# Altium PCB pcb_full_revB.PcbDoc
Units mm, origin at the board's own origin, x right, y up, seen from the top; angles counter-clockwise.
Board outline 25.68 x 19.18 mm, 2 copper layers (Top Layer, Bottom Layer); 35 components, 47 nets, 126 pads, 32 vias.
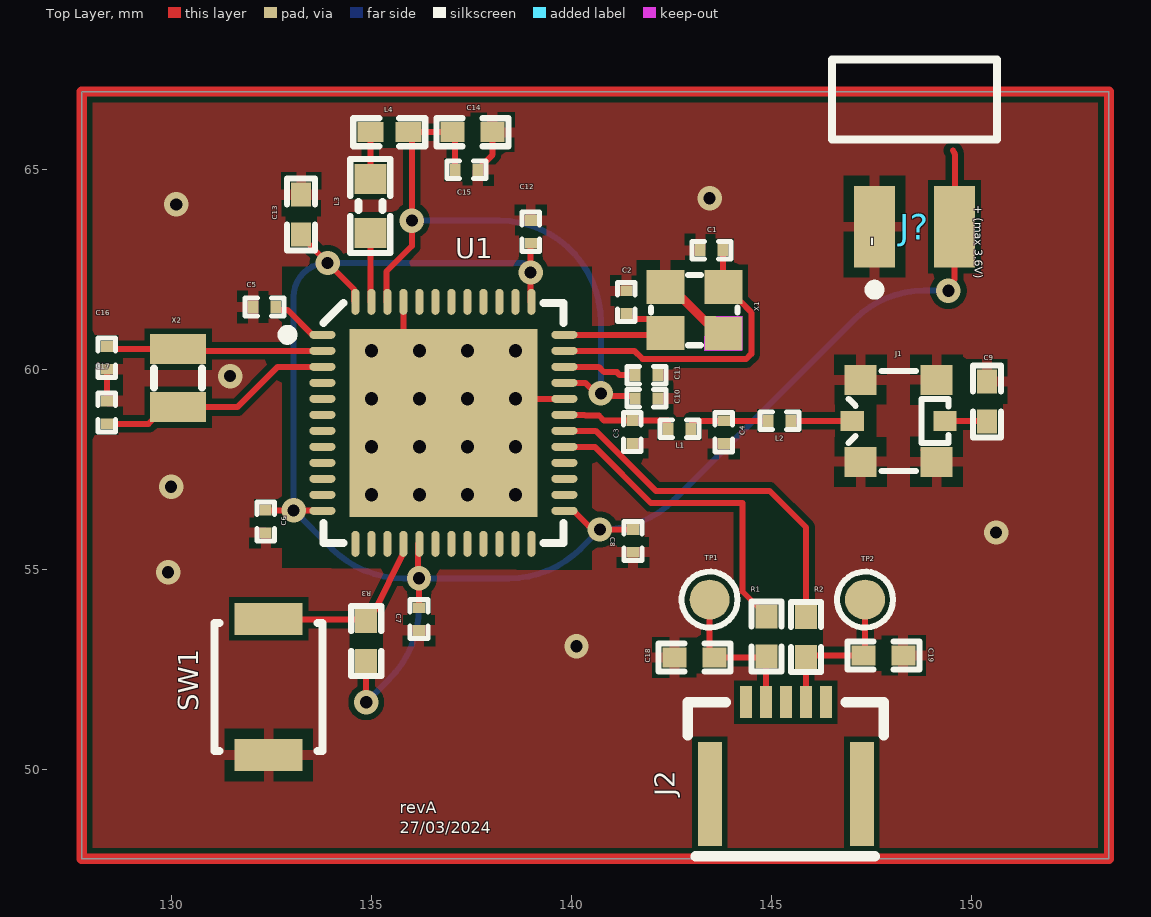
[diagram p0: Top Layer view]
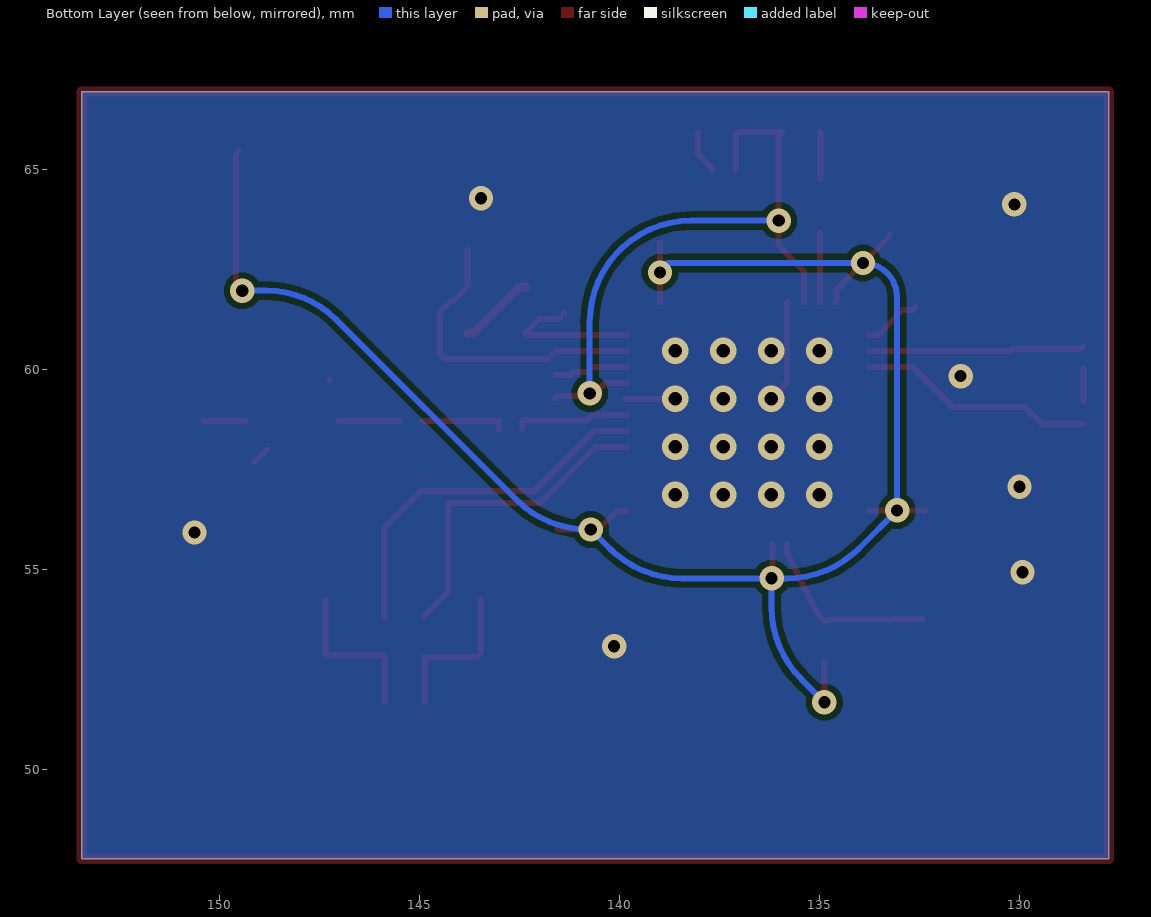
[diagram p1: Bottom Layer view, seen from below]
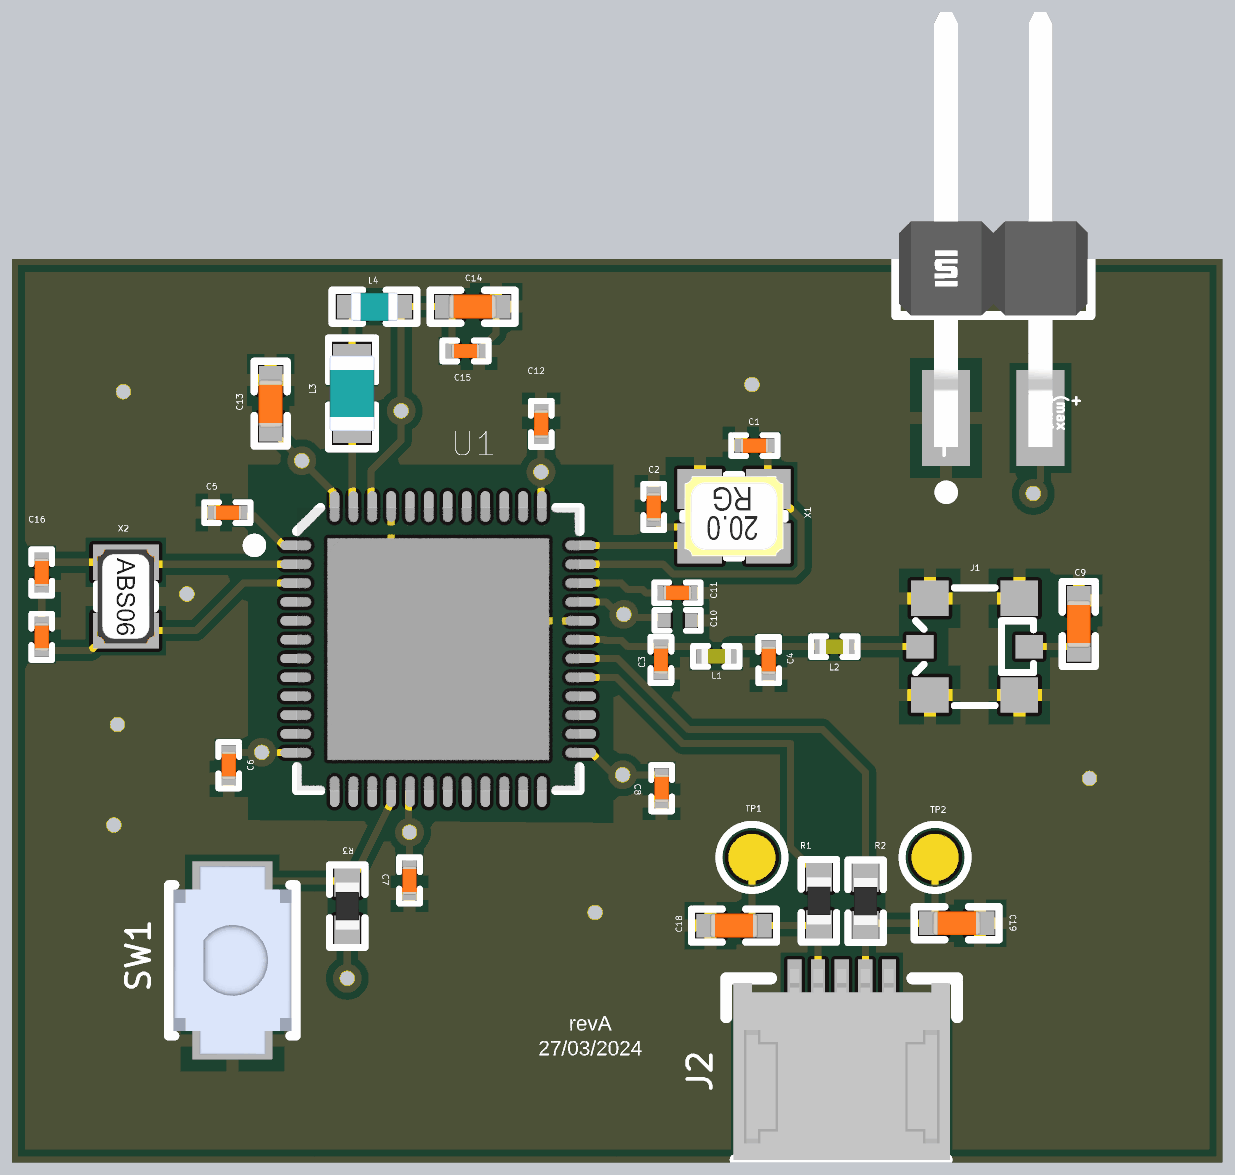
[diagram p2: 3D render of the assembled board from above, using the file's embedded part models]

## Layer stack, top to bottom
Top Solder: solder mask 0.0102, Solder Resist, Dk 3.5
Top Layer: signal copper 0.0356
Dielectric 1: dielectric 0.32, FR-4, Dk 4.8
Bottom Layer: signal copper 0.0356
Bottom Solder: solder mask 0.0102, Solder Resist, Dk 3.5

## Board outline
127.762,47.777 127.762,66.954 153.441,66.954 153.441,47.777

## Design rules (kind name [scope] priority, off if disabled: settings)
Clearance Polygon_ANT [(InNamedPolygon('Top_Layer-GND')) or (InNamedPolygon('Bottom_Layer-GND')) vs InNet('RF')] p1: gap=0.127 ignorepadtopadclearanceinfootprint=FALSE except(0: Arc-Hole Track-Hole SMDPad-Hole THPad-Hole Via-Hole Fill-Hole Poly-Hole Region-Hole Text-Hole)
Clearance Polygon [(InNamedPolygon('Top_Layer-GND')) or (InNamedPolygon('Bottom_Layer-GND'))] p2: gap=0.254 ignorepadtopadclearanceinfootprint=FALSE except(0: Arc-Hole Track-Hole SMDPad-Hole THPad-Hole Via-Hole Fill-Hole Poly-Hole Region-Hole Text-Hole)
Clearance [All] p3: gap=0.15 ignorepadtopadclearanceinfootprint=FALSE
ComponentClearance [All] p1 off: gap=0.254 collisioncheckmode=3 verticalgap=0.254 showdistances=FALSE
FabricationTestPointUsage TestPointUsage [All] p1: valid=0 allowmultiple=FALSE
FabricationTestpoint Testpoint [All] p1: side=3 testpointundercomponent=TRUE minsize=1.016 maxsize=2.54 preferedsize=1.524 minholesize=0 maxholesize=1.016 preferedholesize=0.813 testpointgrid=0.025 allowsidetop=TRUE allowsidebottom=TRUE usegrid=TRUE gridtolerance=0
Height [All] p1 off: minheight=0 maxheight=25.4 prefheight=12.7
HoleSize [All] p1: absolutevalues=TRUE maxlimit=4.064 minlimit=0.305 maxpercent=80.000 minpercent=20.000
MinimumAnnularRing [All] p1 off: minimumring=0.152
PolygonConnect PolygonConnect_1 [isVia and innet(gnd)] p1: connectstyle=Direct reliefconductorwidth=0.254 reliefentries=4 polygonreliefangle="90 Angle" airgapwidth=0.254
PolygonConnect [All] p2: connectstyle=Relief reliefconductorwidth=0.254 reliefentries=4 polygonreliefangle="90 Angle" airgapwidth=0.254
RoutingVias [All] p1: holewidth=0.406 width=0.813 viastyle="Through Hole" minholewidth=0.254 minwidth=0.254 maxholewidth=0.711 maxwidth=1.27
SilkToSolderMaskClearance SilkscreenOverComponentPads [IsPad] p1: minsilkscreentomaskgap=0.254 clearancetoexposedcopper=TRUE
SolderMaskExpansion SolderMaskExpansion_via [IsVia] p1: expansion=0.102 istentingtop=TRUE
SolderMaskExpansion [All] p2: expansion=0.076 istentingtop=FALSE
Width [All] p1: maxlimit=2.54 minlimit=0.15 preferedwidth=0.15
24 further rules are at their usual default settings.

## Components (designator, comment, footprint, x,y, rotation, side; value= is the part's Value field where it differs from the comment)
C1 "12pF" CAPC0603X03L_C#1 143.51,62.992 r180 top
C2 "12pF" CAPC0603X03L_C#1 141.376,61.691 r90 top
C3 "1.0pF" CAPC0603X03L_C#1 141.529,58.445 r90 top
C4 "1.2pF" CAPC0603X03L_C#1 143.815,58.44 r90 top
C5 "100nF" CAPC0603X03L_C#2 132.328,61.57 r180 top
C6 "100nF" CAPC0603X03L_C#2 132.359,56.21 r270 top
C7 "100nF" CAPC0603X03L_C#2 136.195,53.766 r270 top
C8 "100nF" CAPC0603X03L_C#2 141.543,55.722 r270 top
C9 "1.2pF" CAPC1005X04L 150.393,59.207 r90 top
C10 "N.C." CAPC0603X03L_C_NC 141.884,59.284 r180 top
C11 "100pF" CAPC0603X03L_C#1 141.879,59.868 r0 top
C12 "100nF" CAPC0603X03L_C#2 138.989,63.449 r90 top
C13 "1.0µF" CAPC1005X04L 133.248,63.881 r90 top
C14 "1.0µF" CAPC1005X04L 137.533,65.938 r180 top
C15 "47nF" CAPC0603X03L_C#1 137.383,64.999 r0 top
C16 "12pF" CAPC0603X03L_C#1 128.391,60.3 r270 top
C17 "12pF" CAPC0603X03L_C#1 128.391,58.934 r90 top
C18 "300pF" CAPC1005X04L 143.078,52.807 r180 top
C19 "300pF" CAPC1005X04L 147.803,52.857 r180 top
J1 "MM8130-2600" COAXIAL-SWF 148.184,58.725 r90 top
J2 "" FPC_05P-0.5mm-RA-SMD 144.364,51.689 r0 top value="FPC 0.5mm RA SMD"
J? "MMT-102-02-T-SH" FP-MMT-102-02-T-SH-MFG 148.581,66.751 r0 top
L1 "4.7nH" INDC0603X03L_C 142.703,58.522 r0 top
L2 "2.2nH" INDC0603X03L_C 145.206,58.725 r0 top
L3 "10µH" INDC1608X06L 134.976,64.099 r270 top
L4 "15nH" INDC1005X04L 135.451,65.938 r180 top
R1 "0R" RESC1005X04L 144.882,53.332 r90 top
R2 "0R" RESC1005X04L 145.872,53.323 r90 top
R3 "N.C." RESC1005X04L 134.874,53.221 r270 top
SW1 "B3U-1000P" FP-B3U-1000P-MFG 132.436,52.07 r90 top
TP1 "Ø1.0mm,SMD" TP_SMD_Ø1.0mm 143.459,54.254 r0 top
TP2 "Ø1.0mm,SMD" TP_SMD_Ø1.0mm 147.345,54.254 r0 top
U1 "nRF52840-QFAA" QFN40P600X600X90-48N 136.804,58.674 r0 top locked
X1 "32MHz" XTAL_2016_NT 143.078,61.493 r180 top
X2 "32.768kHz" XTAL_2012 130.175,59.792 r270 top

## Footprints (in the part's own frame and the unit in brackets; to place one, negate y for a bottom-side part, rotate by r counter-clockwise, add the part's x,y. Pads: shape width x height; smd on the part's side, far side on the other; paste and mask are expansions set on the pad)
CAPC0603X03L_C#1 [mm]
  rect 0.27x0.3 smd: 1(-0.285,0) 2(0.285,0)
  silkscreen extent -0.49,-0.22 0.49,0.22, body extent -0.3,-0.15 0.31,0.15, height 0.3
CAPC0603X03L_C#2 [mm]
  rect 0.27x0.3 smd mask+0.05: 1(-0.285,0) 2(0.285,0)
  silkscreen extent -0.49,-0.22 0.49,0.22, body extent -0.3,-0.15 0.31,0.15, height 0.3
CAPC0603X03L_C_NC [mm]
  rect 0.27x0.3 smd mask+0.05: 1(-0.285,0) 2(0.285,0)
  silkscreen extent -0.49,-0.22 0.49,0.22
CAPC1005X04L [mm]
  rect 0.6x0.5 smd: 1(-0.5,0) 2(0.5,0)
  silkscreen extent -0.9,-0.35 0.9,0.35, body extent -0.51,-0.25 0.51,0.25, height 0.5
COAXIAL-SWF [mm]
  rect 0.5x0.58 smd: 1(0,1.16) 3(0,-1.16)
  rect 0.75x0.8 smd: 2(-1.025,-0.95) 2(-1.025,0.95) 2(1.025,-0.95) 2(1.025,0.95)
  Top Layer pour cut-out: -0.65,0.55 0.65,0.55 0.65,1.35 -0.65,1.35
  Top Layer pour cut-out: 0.65,-0.55 -0.65,-0.55 -0.65,-1.35 0.65,-1.35
  silkscreen extent -1.25,-1.25 1.25,1.25, body extent -1.26,-1.3 1.26,1.3, height 1.55
FP-B3U-1000P-MFG [mm]
  rect 0.8x1.7 smd paste+0 mask+0: 1(-1.7,0) 2(1.7,0)
  silkscreen extent -1.6,-1.35 1.6,1.35, body extent -2.2,-1.45 2.2,1.45, height 0.25
FP-MMT-102-02-T-SH-MFG [mm]
  rect 1.02x2.03 smd paste+0 mask+0: 1(-1,-3.175) 2(1,-3.175)
  silkscreen extent -2.06,-4.87 2.06,1, body extent -2,-3.79 2,5.44, height 2
FPC_05P-0.5mm-RA-SMD [mm]
  rect 0.6x2.6 smd: 0(-0.9,-2.3) 0(2.9,-2.3)
  rect 0.3x0.8 smd: 1(0,0) 2(0.5,0) 3(1,0) 4(1.5,0) 5(2,0)
  silkscreen extent -1.45,-3.85 3.45,0, body extent -1.3,-3.85 3.3,0.2, height 1.2
INDC0603X03L_C [mm]
  rect 0.27x0.3 smd: 1(-0.285,0) 2(0.285,0)
  silkscreen extent -0.49,-0.22 0.49,0.22, body extent -0.31,-0.16 0.31,0.16, height 0.26
INDC1005X04L [mm]
  rect 0.65x0.5 smd: 1(-0.475,0) 2(0.475,0)
  silkscreen extent -0.9,-0.35 0.9,0.35, body extent -0.5,-0.3 0.5,0.3, height 0.5
INDC1608X06L [mm]
  rect 0.75x0.8 smd: 1(-0.675,0) 2(0.675,0)
  silkscreen extent -1.17,-0.5 1.17,0.5, body extent -0.8,-0.48 0.8,0.48, height 0.8
QFN40P600X600X90-48N [mm]
  oval 0.65x0.2 smd: 1(-3.025,2.2) 2(-3.025,1.8) 3(-3.025,1.4) 4(-3.025,1) 5(-3.025,0.6) 6(-3.025,0.2) 7(-3.025,-0.2) 8(-3.025,-0.6) 9(-3.025,-1) 10(-3.025,-1.4) 11(-3.025,-1.8) 12(-3.025,-2.2) 25(3.025,-2.2) 26(3.025,-1.8) 27(3.025,-1.4) 28(3.025,-1) 29(3.025,-0.6) 30(3.025,-0.2) 31(3.025,0.2) 32(3.025,0.6) 33(3.025,1) 34(3.025,1.4) 35(3.025,1.8) 36(3.025,2.2)
  oval 0.2x0.65 smd: 13(-2.2,-3.025) 14(-1.8,-3.025) 15(-1.4,-3.025) 16(-1,-3.025) 17(-0.6,-3.025) 18(-0.2,-3.025) 19(0.2,-3.025) 20(0.6,-3.025) 21(1,-3.025) 22(1.4,-3.025) 23(1.8,-3.025) 24(2.2,-3.025) 37(2.2,3.025) 38(1.8,3.025) 39(1.4,3.025) 40(1,3.025) 41(0.6,3.025) 42(0.2,3.025) 43(-0.2,3.025) 44(-0.6,3.025) 45(-1,3.025) 46(-1.4,3.025) 47(-1.8,3.025) 48(-2.2,3.025)
  rect 4.7x4.7 smd: 49(0,0)
  silkscreen extent -4.02,-3 3,3, body extent -3.02,-3.02 3.02,3.02, height 0.86
RESC1005X04L [mm]
  rect 0.6x0.55 smd: 1(-0.5,0) 2(0.5,0)
  silkscreen extent -0.87,-0.38 0.88,0.38, body extent -0.5,-0.25 0.5,0.25, height 0.3
TP_SMD_Ø1.0mm [mm]
  round 1 smd paste-5: 1(0,0)
  silkscreen extent -0.7,-0.7 0.7,0.7
XTAL_2012 [mm]
  rect 0.75x1.4 smd: 1(-0.725,0) 2(0.725,0)
  silkscreen extent -0.24,-0.6 0.24,0.6, body extent -1,-0.61 1,0.61, height 0.6
XTAL_2016_NT [mm]
  rect 0.95x0.85 smd: 1(-0.725,-0.575) 2(-0.725,0.575) 2(0.725,-0.575) 3(0.725,0.575)
  Top Layer lines w0.225: 0.725,-0.575 0.575,-0.575 -0.575,0.575 -0.725,0.575
  Top Layer keep-out lines w0.01: -0.25,0.65 -0.25,1 -1.2,1 -1.2,0.15 -0.55,0.15
  silkscreen extent -1.08,-0.88 1.08,0.88, body extent -1.05,-0.85 1.05,0.85, height 0.56

## Part data
C1 C2 C16 C17: library part C0201-12p, "Capacitor, NP0, ±2%", Component Class=Capacitors, Footprint Doc=0201, LatestRevisionDate=2017-11-09, Pad Count=2, Part Number=C0201-12p, Published=2014-11-13
C3: library part C0201-1.0p, "Capacitor, NP0, ±10%", Component Class=Capacitors, Footprint Doc=0201, LatestRevisionDate=2018-10-22, Pad Count=2, Part Number=C0201-1.0p, Published=2014-11-13
C4: library part C0201-1.2p, "Capacitor, NP0, ±10%", Component Class=Capacitors, Footprint Doc=0201, LatestRevisionDate=2020-10-13, Pad Count=2, Part Number=C0201-1.2p, Published=2014-11-13
C5 C6 C7 C8 C12: library part C0201-100n, "Capacitor, X5R, ±10%", Component Class=Capacitors, Footprint Doc=0201, LatestRevisionDate=2017-11-09, Pad Count=2, Part Number=C0201-100n, Published=2014-11-13
C9: library part C0402-1.2p, "Capacitor, NP0, ±0.1pF", Manufacturer=N.A., Part number IPS=00000005410, Artikkelnr Noca=20029157, Author=rsk, Component Class=Capacitors, ComponentLink1Description=Datasheet, ComponentLink1URL=N.A., ComponentLink2Description="Supplier link", ComponentLink2URL=N.A., Footprint Doc=0402, HelpURL=N.A., LatestRevisionDate=2011-05-11, Manufacturer Part Number=N.A., Note=50V, Pad Count=2, Part Number=C0402-1.2p, Part number Norautron=N.A., PartId=100200119, Pin Count=2, Published=2009-05-08, Publisher="Nordic Semiconductor", Supplier 1=N.A., Supplier 2=N.A., Supplier Part Number 1=N.A., Supplier Part Number 2=N.A.
C10: library part C0201-N.C., "Not mounted", Assembly="Not mounted", Component Class=Capacitors, Footprint Doc=0201, LatestRevisionDate=2014-11-13, Pad Count=2, Part Number=C0201-N.C., Published=2014-11-13
C11: library part C0201-100p, "Capacitor, NP0, ±5%", Component Class=Capacitors, Footprint Doc=0201, LatestRevisionDate=2019-04-16, Pad Count=2, Part Number=C0201-100p, Published=2019-04-16
C13 C14: library part C0402-1µ0, "Capacitor, X5R, ±10%", Component Class=Capacitors, Footprint Doc=0402, LatestRevisionDate=2016-08-22, Pad Count=2, Part Number=C0402-1µ0, Published=2009-05-08
C15: library part C0201-47n, "Capacitor, X5R, ±10%", Component Class=Capacitors, Footprint Doc=0201, LatestRevisionDate=2017-11-09, Pad Count=2, Part Number=C0201-47n, Published=2014-11-13
C18 C19: library part C0402-300p, "Capacitor, NP0, ±5%", Manufacturer=N.A., Part number IPS=00000007788, Supplier Part Number 1=490-3234-1-ND, Artikkelnr Noca=20020004, Author=rsk, Component Class=Capacitors, ComponentLink1Description=Datasheet, ComponentLink1URL=N.A., ComponentLink2Description="Supplier link", ComponentLink2URL=N.A., Footprint Doc=0402, HelpURL=N.A., LatestRevisionDate=2020-10-13, Manufacturer Part Number=N.A., Note=50V, Pad Count=2, Part Number=C0402-300p, Part number Norautron=N.A., PartId=100200155, Pin Count=2, Published=2015-05-29, Publisher="Nordic Semiconductor", Supplier 1=Digi-Key, Supplier 2=N.A., Supplier Part Number 2=N.A.
J1: "Coaxial Connector with Switch", Manufacturer=Murata, Part number IPS=00000009955, Part number Norautron=N.A., Supplier Part Number 1=490-4981-1-ND, Artikkelnr Noca=55029011, Author=rsk, Component Class=Connectors, ComponentLink1Description=Datasheet, ComponentLink1URL=N.A., ComponentLink2Description="Supplier link", ComponentLink2URL=N.A., Footprint Doc=COAXIAL-SWF, HelpURL=http://www.murata.com/products/catalog/pdf/o33e.pdf, LatestRevisionDate=2014-04-24, Manufacturer Part Number=MM8130-2600, Note=N.A., Pad Count=3, Part Number=MM8130-2600, PartId=100500400, Pin Count=3, Published=2014-04-24, Publisher="Nordic Semiconductor", Supplier 1=Digi-Key, Supplier 2=Mouser, Supplier Part Number 2=81-MM8130-2600RA2
J2: library part FPC_05P-0.5mm-RA-SMD, "0.5mm FPC, 5P,Right Angle SMT,Double Contact,H=1.2mm,White, Tin plated", Manufacturer=W-CON, Manufacturer Part Number=5141-05RZDNWR01, Part number IPS=00000007792, Part number Norautron=N.A., Artikkelnr Noca=55010020, Author=rsk, Component Class=Connectors, ComponentLink1Description=Datasheet, ComponentLink1URL=N.A., ComponentLink2Description="Supplier link", ComponentLink2URL=N.A., Footprint Doc=FPC_05P-0.5mm-RA-SMD, HelpURL=\\hizz\pro\app9717\Datasheet\connectors\W-CON\5141-XXRZDNXX0X.pdf, LatestRevisionDate=2016-04-21, Note=N.A., Pad Count=7, Part Number=FPC_05P-0.5mm-RA-SMD, PartId=100500528, Pin Count=7, Published=2015-06-22, Publisher="Nordic Semiconductor", Supplier 1=Cabcon, Supplier 2=Digi-Key, Supplier Part Number 1=5141-05RZDNWR01, Supplier Part Number 2=WM9836CT-ND
J?: library part CMP-02766-001413-1, "CONN HEADER SMD R/A 2POS 2MM", Contact Plating=Tin, Gender=Male, Number of Contacts=2, Number of Rows=1, Packaging=Bulk, Pitch=2mm, Radiation Hardening=No, RoHS Compliant=Yes, Termination=Solder
L1: library part L0201-4n7, "High frequency chip inductor ±5%", Component Class=Inductors, Footprint Doc=0201, LatestRevisionDate=2013-04-10, Pad Count=2, Part Number=L0201-4n7, Published=2013-04-10
L2: library part L0201-2n2, "High frequency chip inductor ±5%", Component Class=Inductors, Footprint Doc=0201, LatestRevisionDate=2013-04-10, Pad Count=2, Part Number=L0201-2n2, Published=2013-04-10
L3: library part L0603-10µ-TDK, "Chip inductor, IDC,min = 50 mA, ±20%", Component Class=Inductors, Footprint Doc=0603, LatestRevisionDate=2012-09-19, Pad Count=2, Part Number=L0603-10µ-TDK, Published=2019-05-06
L4: library part L0402-15n, "High frequency chip inductor ±10%", Component Class=Inductors, Footprint Doc=0402, LatestRevisionDate=2012-09-19, Pad Count=2, Part Number=L0402-15n, Published=2010-07-12
R1 R2: library part R0402-0R, "Resistor, ±5%, 0.063W", Manufacturer=N.A., Part number IPS=00000007128, Supplier Part Number 1=146-9661, Artikkelnr Noca=27049000, Author=rsk, Component Class=Resistors, ComponentLink1Description=Datasheet, ComponentLink1URL=N.A., ComponentLink2Description="Supplier link", ComponentLink2URL=N.A., Footprint Doc=0402, HelpURL=N.A., LatestRevisionDate=2009-11-23, Manufacturer Part Number=N.A., Note="Chip Res 5%", Pad Count=2, Part Number=R0402-0R, Part number Norautron=N.A., PartId=100100109, Pin Count=2, Published=2009-05-08, Publisher="Nordic Semiconductor", Supplier 1=Farnell, Supplier 2=N.A., Supplier Part Number 2=N.A.
R3: library part R0402-N.C., "Not mounted", Manufacturer=N.A., Artikkelnr Noca=N.A., Assembly="Not mounted", Author=rsk, Component Class=Resistors, ComponentLink1Description=Datasheet, ComponentLink1URL=N.A., ComponentLink2Description="Supplier link", ComponentLink2URL=N.A., Footprint Doc=0402, HelpURL=N.A., LatestRevisionDate=2009-05-08, Manufacturer Part Number=N.A., Note="Chip Res", Pad Count=2, Part Number=R0402-N.C., Part number IPS=N.A., Part number Norautron=N.A., PartId=100100281, Pin Count=2, Published=2009-05-08, Publisher="Nordic Semiconductor", Supplier 1=N.A., Supplier 2=N.A., Supplier Part Number 1=N.A., Supplier Part Number 2=N.A.
SW1: library part CMP-2100-03586-2, "SWITCH TACTILE SPST-NO 0.05A 12V", Contact Current Rating=50mA, Contact Resistance=100mR, Insulation Resistance=100MR, Max Operating Temperature=70°C, Max Voltage Rating (DC)=12V, Min Operating Temperature=-25°C, Operating Force=1.5N, Package Quantity=1, Ratings="Dust Proof", Actuator Length=0.4mm, Actuator Type=Standard, Contact Material=Silver, Current Rating=50mA, Depth=2.5mm, Electrical Life=200000Cycles, Height=1.2mm, Illumination Type=Non-Illuminated, Lead Free="Lead Free", Length=4mm, Max Current Rating=50mA, Mechanical Life=200000Cycles, Mount="Surface Mount", Orientation=Straight, Packaging="Tape and Reel", Switch Function=Off-Mom, Switch Travel=0.15mm, Termination=SMD/SMT, Throw Configuration=SPST, Voltage Rating (DC)=12V, Weight=0.000776oz, Width=3mm
TP1 TP2: library part TP_SMD_Ø1.0MM, "1.0mm circular SMD testpad", Manufacturer="Nordic Semiconductor", Manufacturer Part Number=N.A., Artikkelnr Noca=N.A., Author=rsk, Component Class=Connectors, ComponentLink1Description=Datasheet, ComponentLink1URL=N.A., ComponentLink2Description="Supplier link", ComponentLink2URL=N.A., Footprint Doc=TP_SMD_Ø1.0mm, HelpURL=N.A., LatestRevisionDate=2021-03-05, Note=N.A., Pad Count=1, Part Number=TP_SMD_Ø1.0MM, Part number IPS=N.A., Part number Norautron=N.A., PartId=100500475, Pin Count=1, Published=2013-06-11, Publisher="Nordic Semiconductor", Supplier 1=N.A., Supplier 2=N.A., Supplier Part Number 1=N.A., Supplier Part Number 2=N.A.
U1: "Multi-protocol Bluetooth Low Energy, IEEE 802.15.4, ANT and 2.4GHz proprietary system-on-chip", Component Class=nRF_Devices, Footprint Doc=QFN-48, LatestRevisionDate=2016-11-22, Pad Count=48, Part Number=nRF52840-QFAA, Published=2016-03-31
X1: library part XTAL_SMD2016_32MHz_8pF_General_NT, "XTAL SMD 2016, 32MHz, Cl=8pF, Total Tol: ±30ppm", Component Class=Oscillators, Footprint Doc=XTAL_2016, LatestRevisionDate=2021-04-08, Pad Count=4, Part Number=XTAL_SMD2016_32MHz_8pF_General_NT, Published=2021-04-08
X2: library part XTAL_SMD2012_32.768kHz_9pF_General, "XTAL SMD 2012, 32.768kHz, Cl=9pF, Total Tol: ±50ppm", Component Class=Oscillators, Footprint Doc=XTAL_2012, LatestRevisionDate=2017-01-11, Pad Count=2, Part Number=XTAL_SMD2012_32.768kHz_9pF_General, Published=2016-08-19

## Via types
v1: diameter 0.61, hole 0.305, Top Layer to Bottom Layer, tented both sides, 16 vias
v2: diameter 0.66, hole 0.33, Top Layer to Bottom Layer, 16 vias

## Nets (pads, with @x,y where several pads share a name; then routed paths per layer and width w, separated by ;. In a path a pad name is that pad's centre, name@x,y a point inside that pad or via, vN(x,y) a via of type N, cw(c..) or ccw(c..) an arc to the next point about the centre after c; other vN are vias at no path point)
ANT: C9.1 J1.3 | length 1.1
  Top Layer w0.15: J1.3 150.393,58.725 C9.1
DEC1: C5.1 U1.1 | length 1.4
  Top Layer w0.15: C5.1 132.613,61.555 132.673,61.495 132.908,61.495 133.529,60.874 U1.1@133.754,60.874
DEC3: C11.1 U1.34 | length 1.9
  Top Layer w0.15: U1.34@139.804,60.074 140.685,60.074 140.818,59.941 141.14,59.941 141.213,59.868 C11.1
DEC4_6: C10.2 C14.2 C15.1 L4.1 U1.33 U1.46 | length 16.5
  Top Layer w0.15: U1.46@135.379,61.699 135.379,62.457 136.017,63.095 v1(136.017,63.729) 136.017,65.847 L4.1 C14.2 137.098,65.873 C15.1 ; U1.33@139.804,59.674 140.354,59.674 140.617,59.411 v1(140.741,59.411) 140.805,59.347 141.539,59.347 141.599,59.287 C10.2
  Bottom Layer w0.15: v1(136.017,63.729) 138.201,63.729 cw(c138.201,61.189) 140.741,61.189 v1(140.741,59.411)
GND: C1.2 C2.2 C3.1 C4.1 C5.2 C6.2 C7.2 C8.2 C9.2 C10.1 C11.2 C12.2 C13.2 C14.1 C15.2 C16.2 C17.2 C18.2 C19.1 J1.2 J?.1 SW1.1 U1.32 U1.45 U1.49 X1.2 | length 6.2
  Top Layer w0.15: C17.2 C16.2 ; U1.45 135.804,59.674 v2(136.204,59.274) ; C15.2 137.668,65.014 138.033,65.379 C14.1 ; v2(138.604,59.274) U1.32 ; J1.2@147.234,59.75 J1.2@147.259,59.75 ; J1.2@148.809,58 149.109,57.7 J1.2@149.134,57.7
  other v1: 140.132,53.086 129.921,54.94 150.622,55.931 129.997,57.074 131.47,59.842 130.124,64.135 143.459,64.287
  other v2: 135.004,56.874 136.204,56.874 137.404,56.874 138.604,56.874 135.004,58.074 136.204,58.074 137.404,58.074 138.604,58.074 135.004,59.274 137.404,59.274 135.004,60.474 136.204,60.474 137.404,60.474 138.604,60.474
NetC3_2: C3.2 L1.1 U1.31 | length 2.9
  Top Layer w0.15: U1.31@139.804,58.874 140.336,58.874 140.353,58.857 140.693,58.857 140.82,58.73 C3.2 142.418,58.73 L1.1
NetC4_2: C4.2 L1.2 L2.1 | length 2.1
  Top Layer w0.15: L1.2 143.013,58.522 143.013,58.725 C4.2 L2.1
NetL3_1: L3.1 L4.2 | length 1.2
  Top Layer w0.15: L3.1 L4.2
NetL3_2: L3.2 U1.47 | length 1.7
  Top Layer w0.15: L3.2 134.979,63.42 U1.47@134.979,61.699
NFC1: C18.1 J2.2 R1.1 TP1.1 | length 3.9
  Top Layer w0.15: TP1.1 143.459,52.926 C18.1 144.856,52.807 144.864,52.815 J2.2
NFC2: C19.2 J2.4 R2.1 TP2.1 | length 4
  Top Layer w0.15: J2.4 145.864,52.815 R2.1 145.907,52.857 C19.2 147.345,52.9 TP2.1
P0.00/XL1: C16.1 U1.2 X2.1 | length 5.4
  Top Layer w0.15: C16.1 128.406,60.585 128.474,60.517 X2.1 130.218,60.474 U1.2@133.754,60.474
P0.01/XL2: C17.1 U1.3 X2.2 | length 6
  Top Layer w0.15: C17.1 129.432,58.649 129.85,59.067 X2.2 131.654,59.067 132.661,60.074 U1.3@133.754,60.074
P0.02/AIN0: U1.40
P0.03/AIN1: U1.39
P0.04/AIN2: U1.4
P0.05/AIN3: U1.5
P0.07: U1.6
P0.08: U1.7
P0.09/NFC1: R1.2 U1.29 | length 8.1
  Top Layer w0.15: U1.29@139.804,58.074 U1.29 140.588,58.074 141.994,56.667 144.281,56.667 144.281,54.457 144.882,53.857 R1.2
P0.10/NFC2: R2.2 U1.30 | length 9.3
  Top Layer w0.15: U1.30@139.804,58.474 U1.30 140.612,58.474 142.114,56.972 144.957,56.972 145.872,56.057 145.872,53.848 R2.2
P0.11: U1.10
P0.12: U1.11
P0.13: U1.13
P0.14: U1.14
P0.17: U1.15
P0.18/RESET: R3.1 SW1.2 U1.16 | length 4.6
  Top Layer w0.15: SW1.2 133.211,53.754 134.674,53.754 R3.1 135.074,53.946 135.804,55.424 U1.16
P0.19: U1.18
P0.20: U1.19
P0.21: U1.20
P0.22: U1.21
P0.23: U1.22
P0.24: U1.23
P0.28/AIN4: U1.41
P0.29/AIN5: U1.42
P0.30/AIN6: U1.43
P0.31/AIN7: U1.44
P1.00: U1.24
P1.08: U1.8
P1.09: U1.9
P1.15: U1.38
RF: J1.1 L2.2 | length 1.5
  Top Layer w0.15: L2.2 J1.1
SWDCLK: U1.27
SWDIO: U1.26
VDD_nRF: C6.1 C7.1 C8.1 C12.1 C13.1 J?.2 R3.2 U1.12 U1.17 U1.25 U1.37 U1.48 | length 48.6
  Top Layer w0.15: C6.1 132.371,56.484 v1(133.058,56.484) 133.744,56.484 U1.12@133.754,56.474 ; C13.1 133.248,63.331 v1(133.909,62.67) 134.569,62.01 134.569,61.709 U1.48@134.579,61.699 ; v1(134.874,51.689) R3.2 ; v1@136.174,54.788 136.174,55.644 136.179,55.649 U1.17@136.179,55.41 ; C7.1 v1(136.195,54.788) ; U1.37@138.979,61.699 138.984,61.704 v1(138.984,62.432) 138.984,63.159 C12.1 ; U1.25 139.846,56.458 140.071,56.458 140.433,56.095 140.628,56.095 v1(140.716,56.007) C8.1 C8.1@141.547,56.007 ; v1(149.428,61.976) 149.428,62.1 149.581,62.253 J?.2 149.591,63.586 149.591,65.357 ccw(c149.415,65.357) 149.539,65.481
  Bottom Layer w0.15: v1(134.874,51.689) 135.451,52.266 ccw(c133.655,54.062) 136.195,54.062 v1(136.195,54.788) ; v1@138.859,62.432 v1(138.984,62.432) ccw(c138.745,62.432) 138.745,62.67 v1(133.909,62.67) ccw(c133.909,61.819) 133.058,61.819 v1(133.058,56.484) 134.01,55.532 ccw(c135.806,57.328) 135.806,54.788 v1(136.195,54.788) ; 147.077,61.254 142.573,56.751 cw(c140.777,58.547) 140.777,56.007 v1(140.716,56.007) 140.241,55.532 cw(c138.445,57.328) 138.445,54.788 v1(136.195,54.788) ; 147.077,61.255 cw(c148.819,59.512) 148.819,61.976 v1(149.428,61.976)
XC1: C1.1 U1.35 X1.1 | length 7.8
  Top Layer w0.15: U1.35@139.804,60.474 141.579,60.474 141.785,60.268 144.371,60.268 144.503,60.4 144.503,61.437 144.221,61.718 144.153,61.718 X1.1 143.795,62.077 C1.1
XC2: C2.1 U1.36 X1.3 | length 3.7
  Top Layer w0.15: U1.36@139.804,60.874 142.309,60.874 X1.3 142.003,61.268 141.529,61.268 141.391,61.406 C2.1
pads on no net: J2.0 J2.1 J2.3 J2.5 U1.28
copper on no net: | length 89.7
  Top Layer w0.254: 127.762,47.777 153.441,47.777 153.441,66.954 127.762,66.954 127.762,47.777

## Polygon pours and split planes (outlines as drawn)
GND on Top Layer "GND_L01_P002" (solid, remove dead copper, pour order 2): 127.737,66.98 127.762,66.954 153.441,66.954 153.441,47.777 127.762,47.777
GND on Bottom Layer "GND_L02_P001" (solid, pour order 1): 127.787,66.929 127.787,66.954 153.441,66.954 153.441,47.777 127.762,47.777

## Other copper
Top Layer:
  pour cut-out: 132.766,55.045 132.766,62.586 140.523,62.586 140.523,54.986

## Silkscreen, mask and mechanical layers (free items; w line width, h text height)
Top Overlay:
  text "+ (max 3.6V)" at 150.089,64.11 h0.2 r270
  text "-" at 147.343,63.328 h0.5 r270
  text "revA / 27/03/2024" at 135.714,48.311 h0.5